# Altium PCB Controller PCB.PcbDoc (part 1 of 2)
Units mm, origin at the board's own origin, x right, y up, seen from the top; angles counter-clockwise.
Board outline 152.4 x 101.6 mm, 4 copper layers (Top Layer, Power, Ground, Bottom Layer), stack 0.903 mm thick; 79 components, 88 nets, 350 pads, 72 vias.
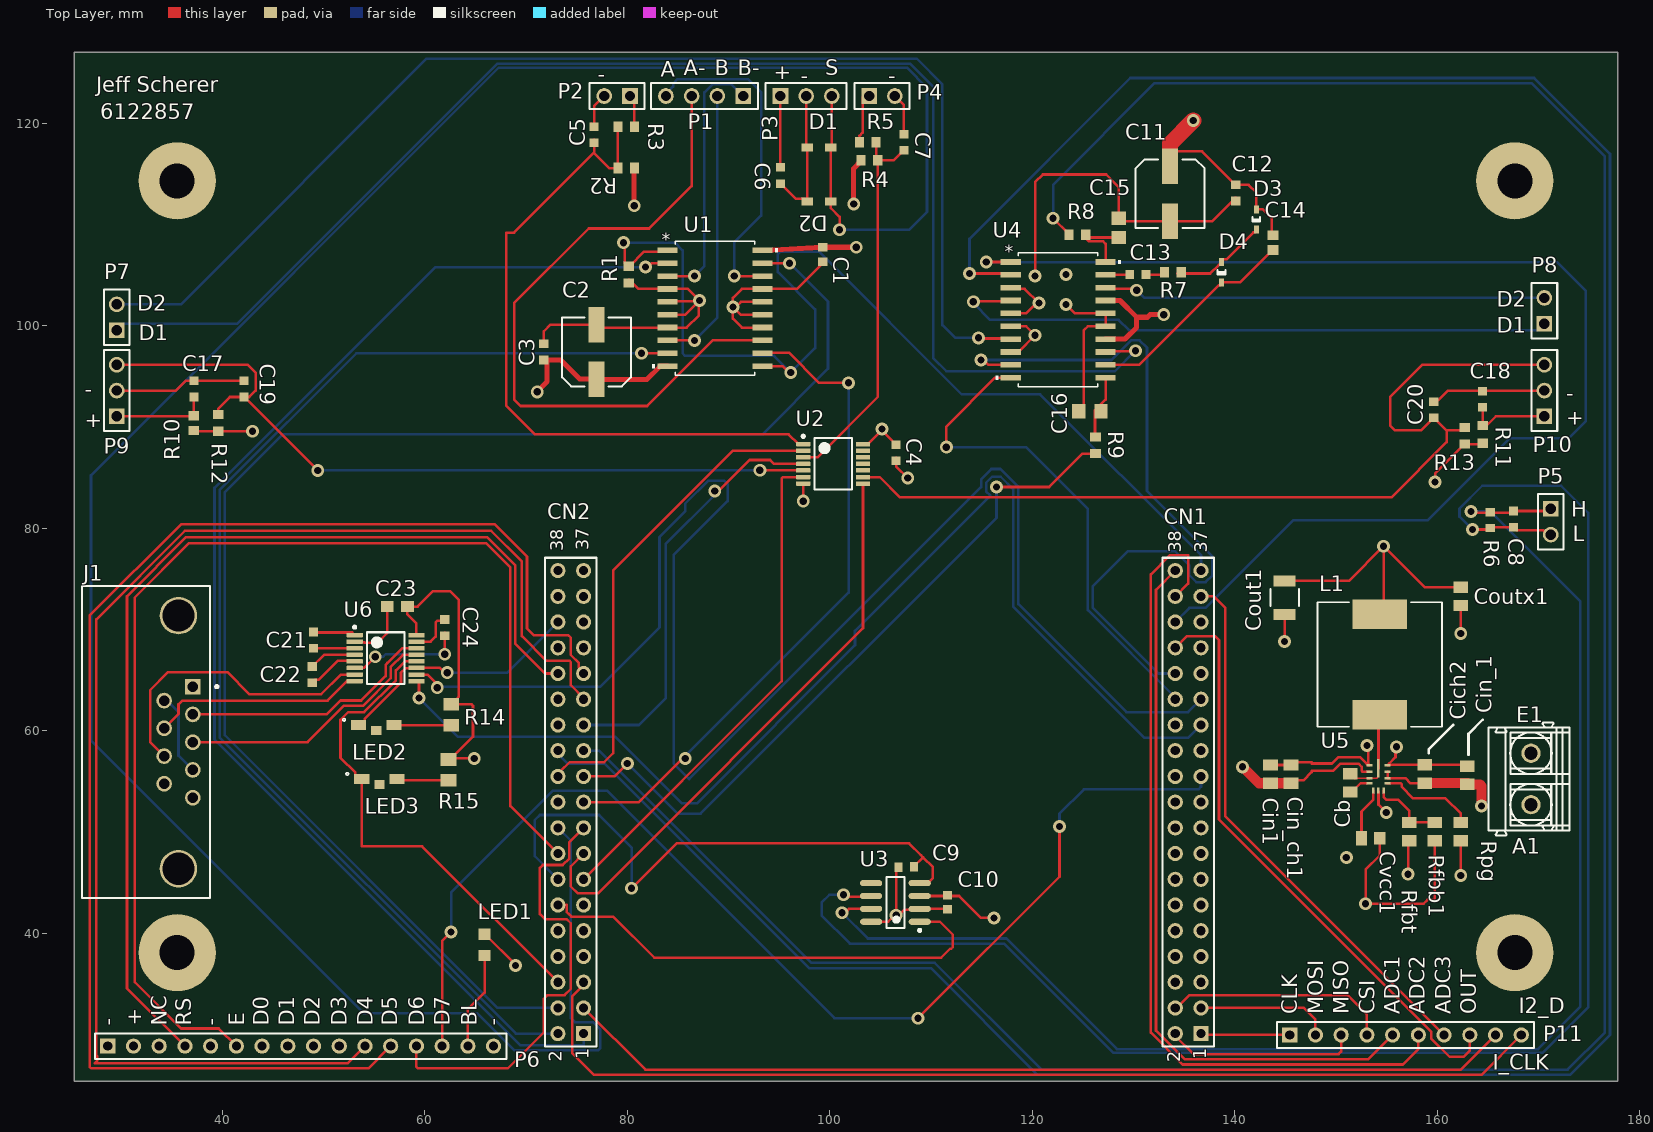
[diagram p0: Top Layer view]
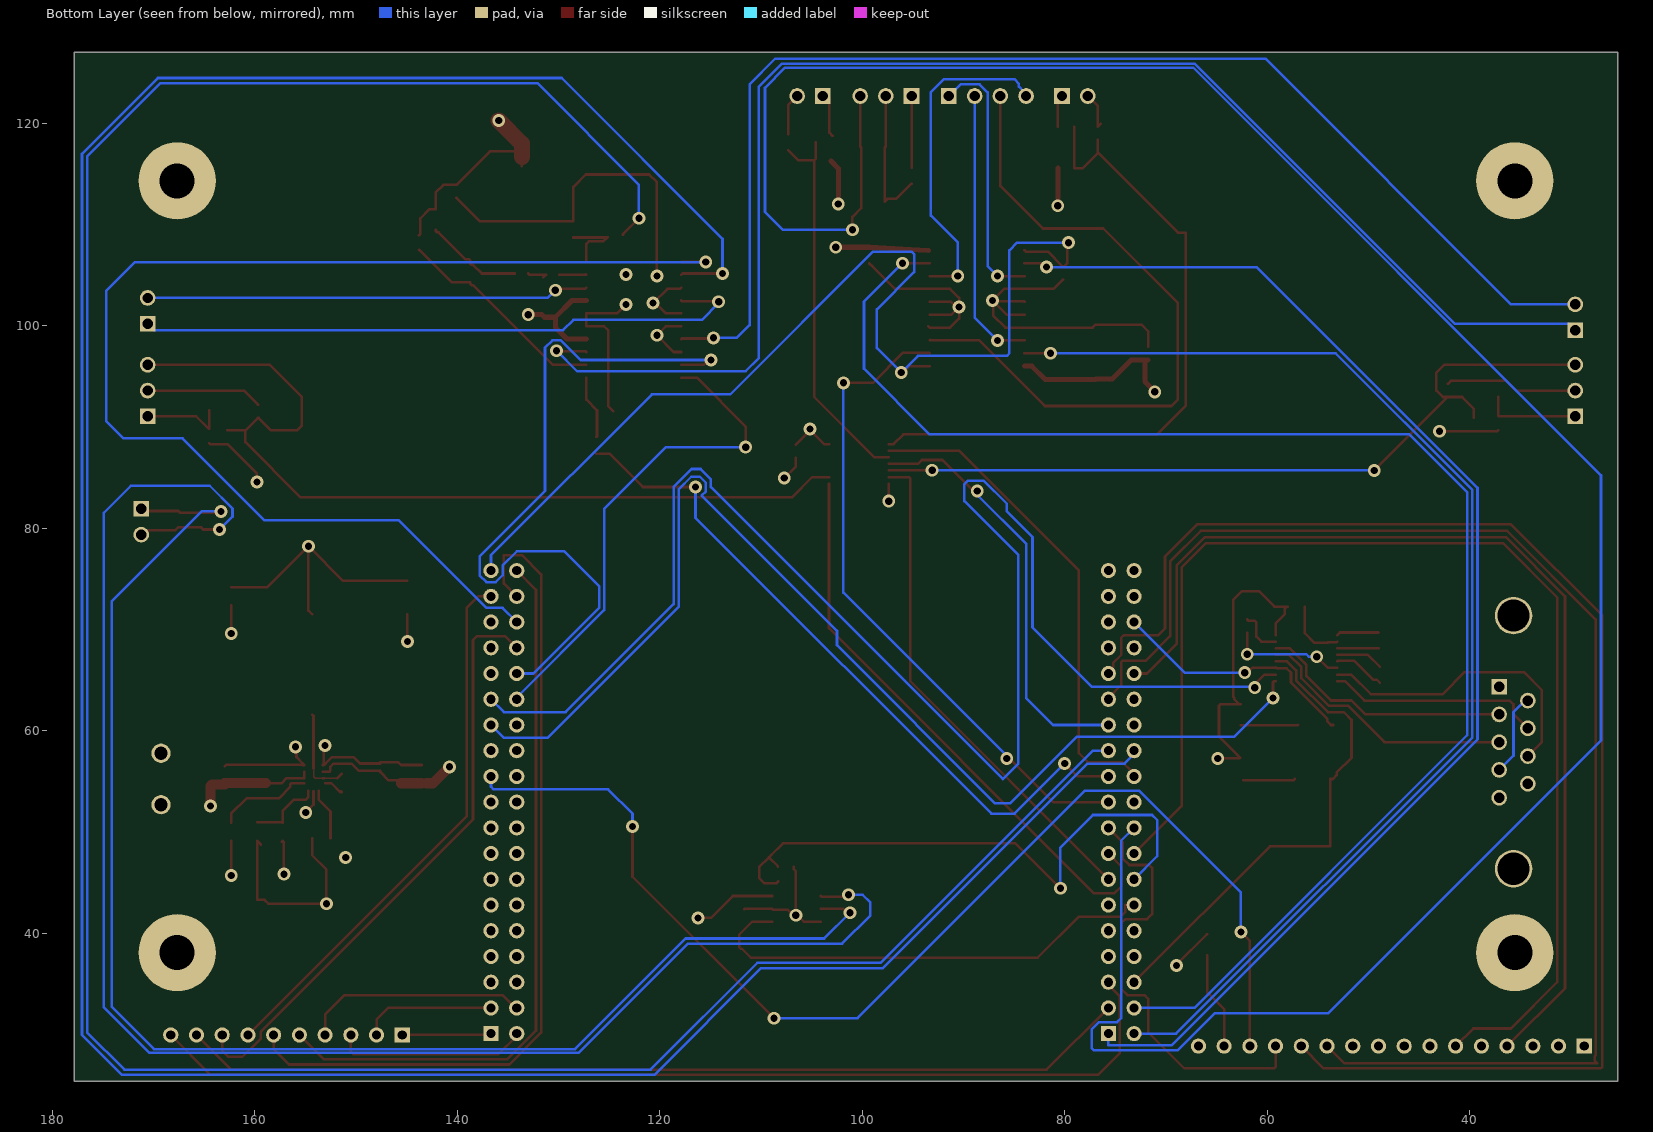
[diagram p1: Bottom Layer view, seen from below]
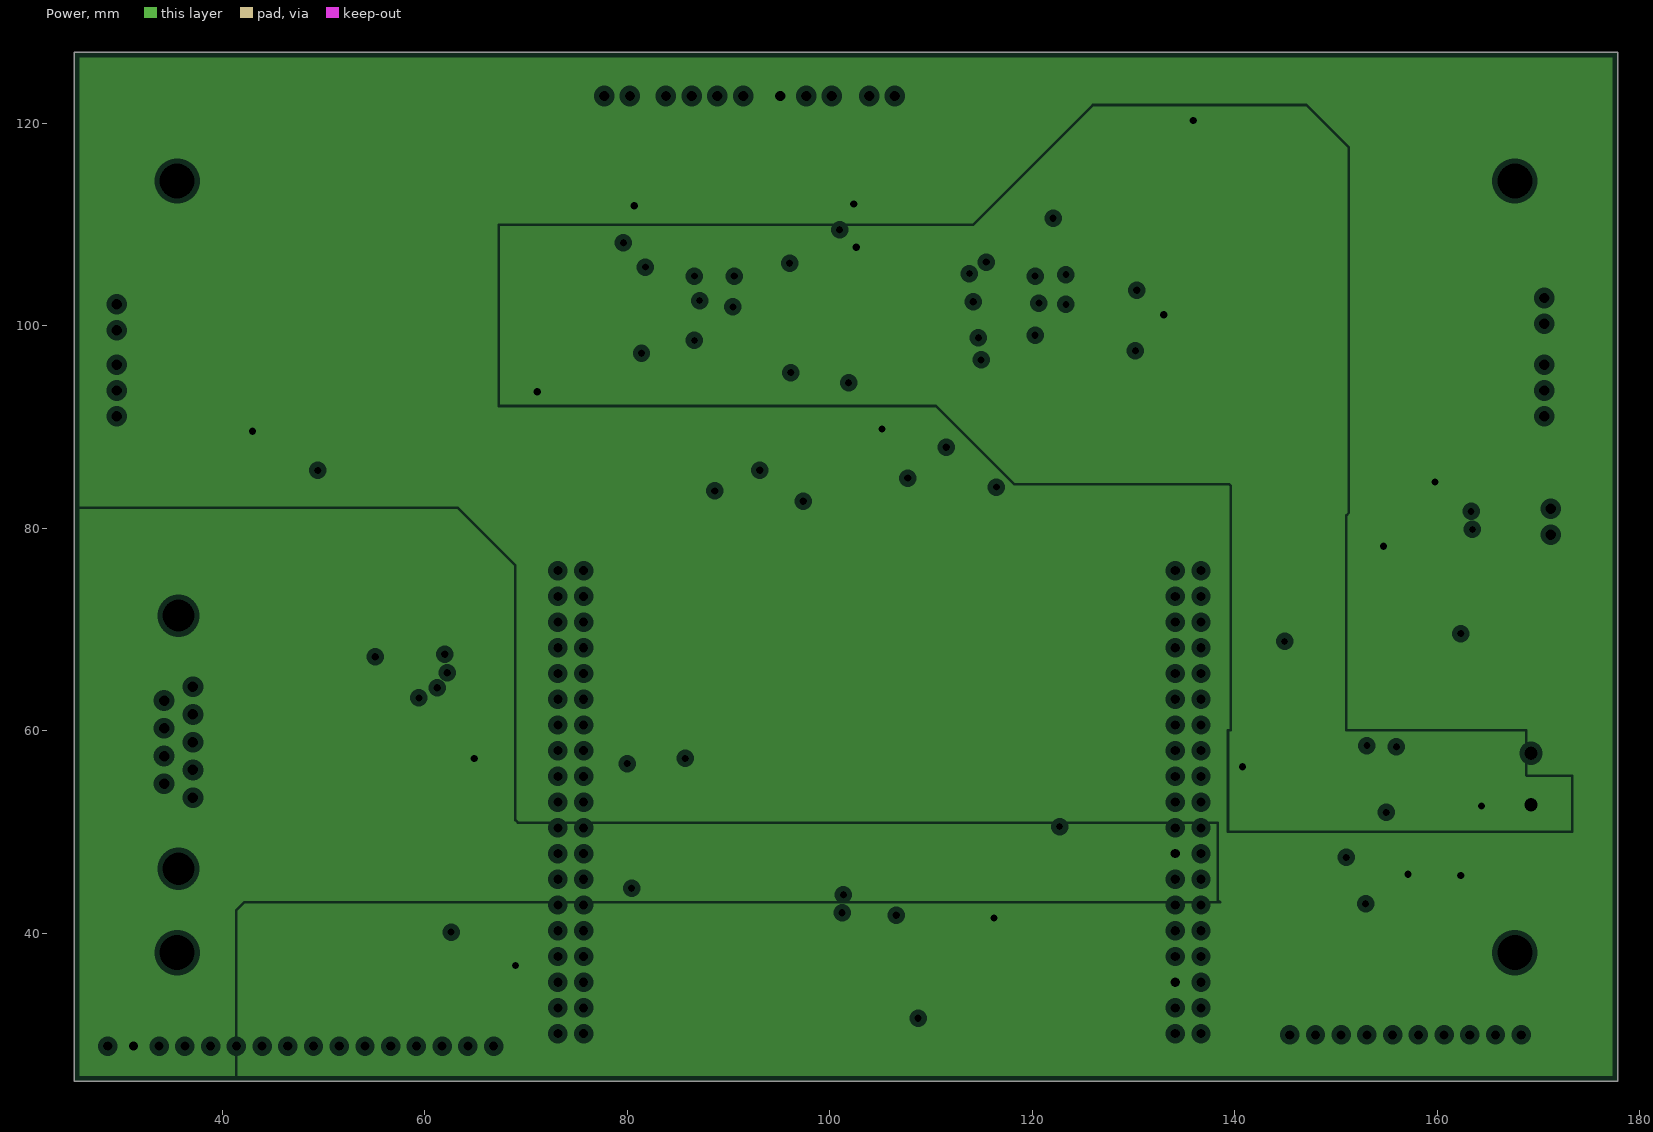
[diagram p2: Power, clearances drawn from the general rule]
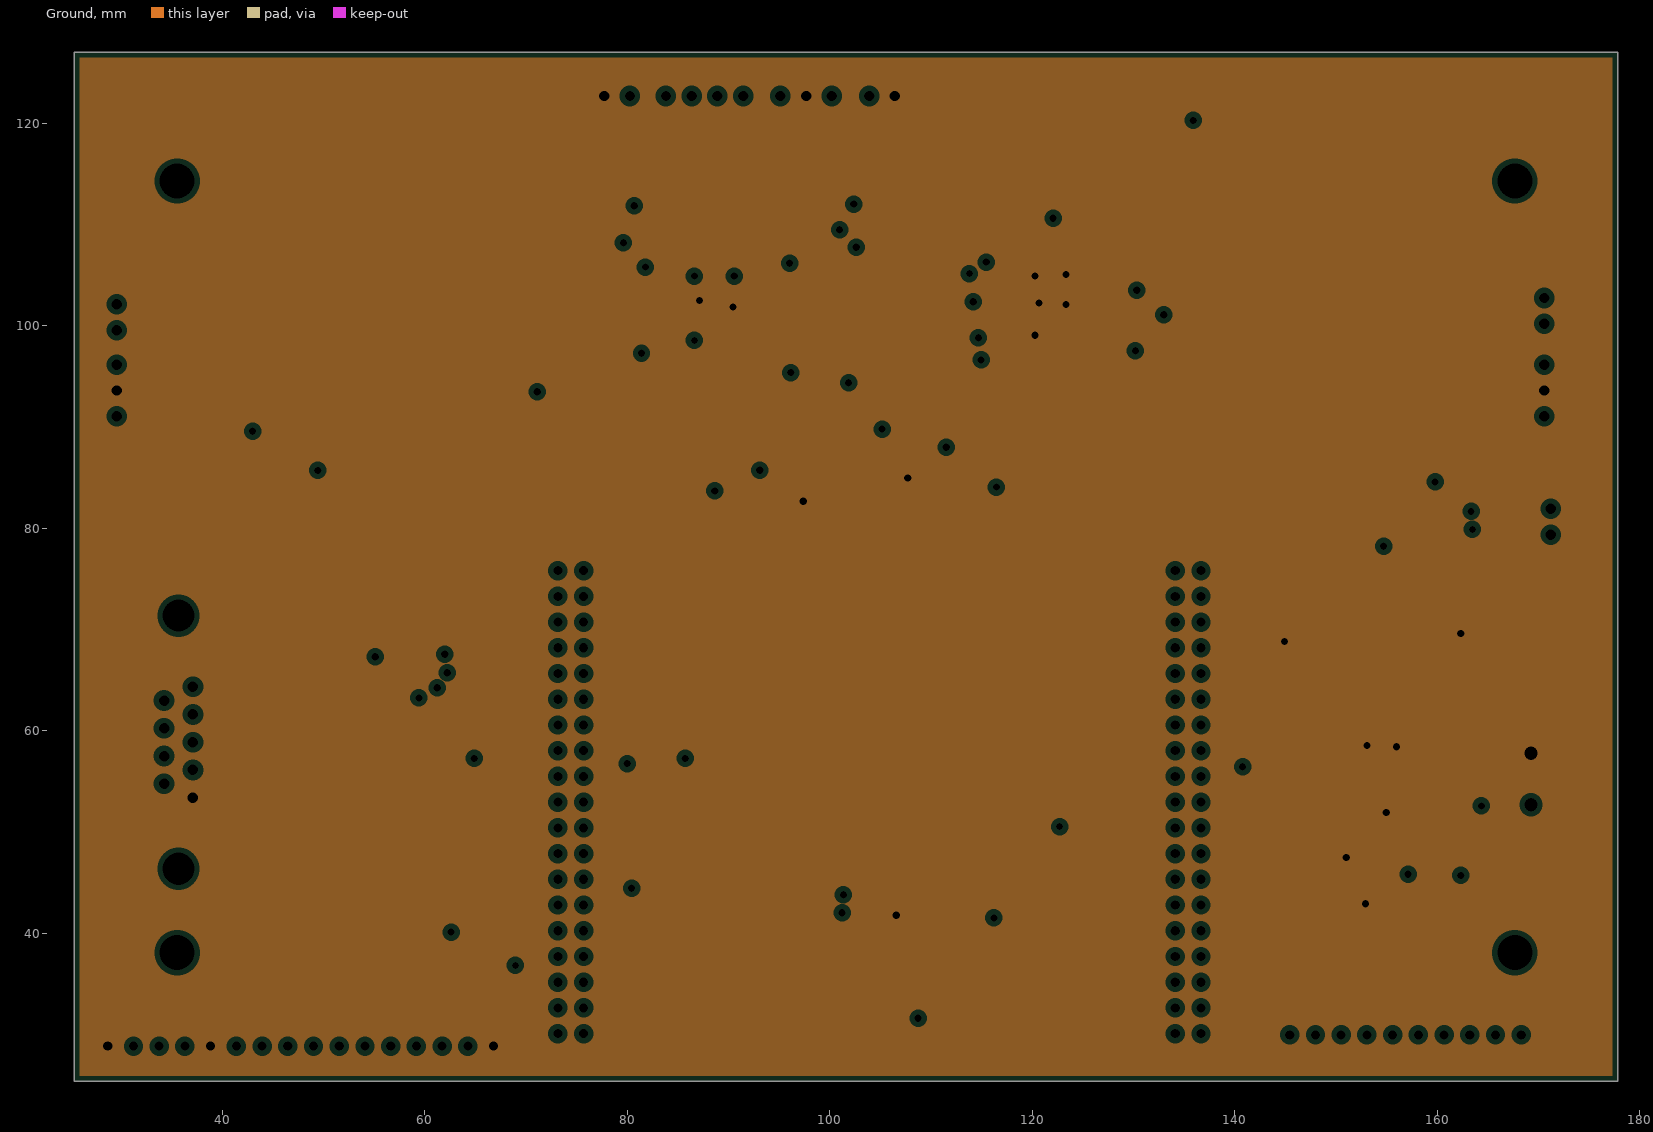
[diagram p3: Ground, clearances drawn from the general rule]

## Layer stack, top to bottom
Top Solder: solder mask 0.0102, Solder Resist, Dk 3.5
Top Layer: signal copper 0.0356
Dielectric 2: prepreg 0.254, PP-006, Dk 4.1
Power: plane copper 0.035, net (Multiple Nets)
Dielectric 1: dielectric 0.254, FR-4, Dk 4.8
Ground: plane copper 0.035, net GND
Dielectric 3: prepreg 0.254, PP-006, Dk 4.1
Bottom Layer: signal copper 0.0356
Bottom Solder: solder mask 0.0102, Solder Resist, Dk 3.5

## Board outline
25.4,25.4 177.8,25.4 177.8,127 25.4,127

## Design rules (kind name [scope] priority, off if disabled: settings)
BoardOutlineClearance [All] p1: gap=0.508 ignorepadtopadclearanceinfootprint=FALSE
Clearance [All] p1: gap=0.13 ignorepadtopadclearanceinfootprint=TRUE
HoleSize [All] p1: absolutevalues=TRUE maxlimit=3.81 minlimit=0.254 maxpercent=80.000 minpercent=20.000
MinimumSolderMaskSliver [All] p1: minsoldermaskwidth=0.245
PlaneClearance [All] p1: clearance=0.508
PlaneConnect [All] p1: planeconnectstyle=Relief reliefexpansion=0.508 reliefentries=4 reliefconductorwidth=0.254 reliefairgap=0.254
PolygonConnect [All] p1: connectstyle=Relief reliefconductorwidth=0.254 reliefentries=4 polygonreliefangle="90 Angle" airgapwidth=0.254
RoutingVias [All] p1: holewidth=0.711 width=1.27 viastyle="Through Hole" minholewidth=0.711 minwidth=1.27 maxholewidth=3.81 maxwidth=8.89
SilkToSilkClearance [All] p1: silktosilkclearance=0.25
SilkToSolderMaskClearance [IsPad] p1: minsilkscreentomaskgap=0.25 clearancetoexposedcopper=TRUE
SolderMaskExpansion [All] p1: expansion=0.102
Width [All] p1: maxlimit=3 minlimit=0.135 preferedwidth=0.254 minimp=50.000000 maximp=50.000000 favimp=50.000000
24 further rules are at their usual default settings.

## Classes and differential pairs
component class "Wheel Module": C11 C12 C13 C15 C16 C17 C18 C19 C20 D3 D4 P7 P8 P9 P10 R7 R8 R9 R10 R11 R12 R13 U4
component class "Something Dope": P11
component class RS232: C21 C22 C23 C24 J1 LED2 LED3 R14 R15 U6
component class "Power Supply": Cb Cich2 Cin1 Cin_1 Cin_ch1 Cout1 Coutx1 Cvcc1 E1 L1 Rfbb1 Rfbt Rpg U5
component class MCU: CN1 CN2
component class "LCD Display": LED1 P6
component class CAN: C8 C9 C10 P5 R6 U3
component class "Camera Module": C1 C2 C3 C4 C5 C6 C7 D1 D2 P1 P2 P3 P4 R1 R2 R3 R4 R5 U2

## Components (designator, comment, footprint, x,y, rotation, side; value= is the part's Value field where it differs from the comment)
C1 "0.1uF" CAPC1608X90X35LL15T15#1 99.299,106.792 r90 top
C2 "33uF" NIC-CAPA2-6.3X7.7_V 76.962,97.409 r90 top
C3 "0.1uF" CAPC1608X90X35LL15T15#2 71.755,97.267 r270 top
C4 "0.1uF" CAPC1608X90X35LL15T15#2 106.553,87.615 r90 top
C5 "0.1uF" CAPC1608X90X35LL15T15#3 76.733,118.999 r270 top
C6 "0.1uF" CAPC1608X90X35LL15T15#3 95.123,114.681 r90 top
C7 "0.1uF" CAPC1608X90X35LL15T15#2 107.315,117.968 r270 top
C8 "0.1uF" CAPC1608X90X35LL15T15#3 167.513,80.757 r90 top
C9 "30pF" CAPC1608X87X35LL15T15 107.398,46.534 r0 top
C10 "0.1uF" CAPC1608X90X35LL15T15#4 111.633,43.039 r90 top
C11 "100uF" NIC-CAPA2-6.3X5.8_V 133.604,113.03 r270 top
C12 "0.1uF" CAPC1608X90X35LL15T15#2 140.081,113.269 r90 top
C13 "10000pF" CAPC1608X90X35LL15T15#2 130.571,105.048 r0 top
C14 "0.22uF" CAPC1608X90X35ML10T15 143.764,108.204 r90 top
C15 "1000pF" CAPC2013X140X50NL20T25#1 128.524,109.512 r270 top
C16 "1000pF" CAPC2013X140X50NL20T25#2 125.387,91.567 r0 top
C17 "0.1uF" CAPC1608X90X35LL15T15#2 37.211,93.614 r270 top
C18 "0.1uF" CAPC1608X90X35LL15T15#5 164.465,92.598 r270 top
C19 "0.1uF" CAPC1608X90X35LL15T15#2 42.164,93.614 r270 top
C20 "0.1uF" CAPC1608X90X35LL15T15#6 159.639,91.552 r270 top
C21 "0.1uF" CAPC1608X90X35LL15T15#3 49.022,68.808 r90 top
C22 "0.1uF" CAPC1608X90X35LL15T15#3 48.895,65.405 r90 top
C23 "0.1uF" CAPC1608X90X35ML15T15 57.15,72.263 r180 top
C24 "0.1uF" CAPC1608X90X35LL15T15#3 61.976,70.343 r270 top
Cb "CC0805KRX7R9BB104" 0805#1 151.384,54.864 r90 top value=100nF (schematic designator Cboot1)
Cich2 "GRM32ER71J106KA12L" 0805#1 158.75,55.74 r90 top value=10uF (schematic designator Cin_ch2)
Cin1 "GRM32ER71J106KA12L" 0805#1 143.51,55.726 r90 top value=10uF
Cin_1 "GRM32ER71J106KA12L" 0805#1 162.941,55.613 r90 top value=10uF
Cin_ch1 "GRM32ER71J106KA12L" 0805#1 145.542,55.722 r90 top value=10uF
CN1 "Header 19X2" HDR2X19 136.652,30.099 r90 top locked
CN2 "Header 19X2" HDR2X19 75.692,30.099 r90 top locked
Cout1 "C3225X5R0J686M200AC" 1210_280 144.907,73.152 r270 top value=68uF
Coutx1 "GRM21BR71A105KA01L" 0805#1 162.306,73.279 r270 top value=1uF
Cvcc1 "C0603C105Z8VACTU" 0805#2 153.403,49.403 r0 top value=1uF
D1 "ZHCS400" DIOD-SOD323-2_V 98.933,117.602 r180 top
D2 "ZHCS400" DIOD-SOD323-2_V 98.933,112.268 r180 top
D3 "1N4148WT" FAIR-SOD-523F-2_V 142.113,110.49 r90 top
D4 "1N4148WT" FAIR-SOD-523F-2_V 138.684,105.283 r90 top
E1 "1760490000" PM_5_08_90_02 169.037,55.245 r90 top locked
J1 "5747840-4" TECO-5747840-4_V 35.687,58.879 r270 top
L1 "CDRH125NP-180MC" CDRH125 154.305,66.548 r90 top value=18uH
LED1 "150080YS75000" 0805_A 65.913,38.862 r90 top
LED2 "" 1204 55.217,60.579 r0 top
LED3 "" 1204 55.527,55.245 r0 top
P1 "STEP_MOTOR_CONNECTION" SMTC-TSW-104-08-X-S 91.44,122.682 r180 top
P2 "1" SMTC-DW-02-16-X-S-200 80.264,122.682 r180 top
P3 "SERVO_CONNECTION" SMTC-TSW-103-07-X-S 95.123,122.682 r0 top
P4 "1" SMTC-DW-02-16-X-S-200 103.886,122.682 r0 top
P5 "1" SMTC-DW-02-16-X-S-200 171.196,81.915 r270 top
P6 "Header 16" HDR1X16 28.702,28.864 r0 top
P7 "DC_MOTOR1" SMTC-DW-02-16-X-S-200 29.591,99.568 r90 top
P8 "DC_MOTOR2" SMTC-DW-02-16-X-S-200 170.561,100.203 r90 top
P9 "DC_ENCODER" SMTC-TSW-103-07-X-S 29.591,91.059 r90 top
P10 "DC_ENCODER" SMTC-TSW-103-07-X-S 170.561,91.059 r90 top
P11 "Header 10" HDR1X10 145.415,29.972 r0 top
R1 "10K" RESC1609X50X30ML10T20#1 80.137,105.196 r90 top
R2 "10K" RESC1609X50X30ML10T20#1 79.756,115.57 r180 top
R3 "100R" RESC1609X50X30ML10T20#1 79.756,119.634 r180 top
R4 "10K" RESC1609X50X30ML10T20#2 103.759,116.332 r0 top
R5 "100R" RESC1609X50X30ML10T20#2 103.592,118.11 r0 top
R6 "60R" RESC1609X50X30NL10T20 165.227,80.655 r90 top
R7 "100R" RESC1609X50X30ML10T20#2 133.731,105.283 r0 top
R8 "10K" RESC1609X50X30ML10T20#2 124.293,108.966 r0 top
R9 "10K" RESC1609X50X30ML10T20#1 126.238,88.352 r90 top
R10 "332R" RESC1608X55X30ML15T15#1 37.211,90.387 r270 top
R11 "332R" RESC1608X55X30ML15T15#2 164.465,89.117 r270 top
R12 "10K" RESC1609X50X30ML10T20#2 39.624,90.257 r90 top
R13 "10K" RESC1609X50X30ML10T20#2 162.687,88.987 r90 top
R14 "1K" RESC2013X60X30ML20T20 62.611,61.586 r270 top
R15 "1K" RESC2013X60X30ML20T20 62.357,56.143 r270 top
Rfbb1 "ERJ-6ENF2492V" 0805#1 159.751,50.051 r270 top value=24.9k
Rfbt "CRCW0402100KFKED" 0805#1 157.226,50.038 r90 top value=100k (schematic designator Rfbt1)
Rpg "CRCW0402100KFKED" 0805#1 162.306,50.038 r90 top value=100k (schematic designator Rpg1)
U1 "Part Number: L293DD013TR" SO-20 88.659,101.727 r0 top locked value=Value
U2 "SN74ACT14PWR" PW0014A_N 100.33,86.36 r0 top
U3 "MCP2551-E/SN" SOIC-SN8_N 106.477,43.054 r180 top
U4 "Part Number: L6225D" SO-20 122.555,100.584 r0 top locked value=Value
U5 "LMR33630ARNXR" RNX0012B 154.178,55.499 r0 top value=N/A
U6 "MAX3232ECPWR" PW0016A_M 56.134,67.183 r0 top

## Footprints (in the part's own frame and the unit in brackets; to place one, negate y for a bottom-side part, rotate by r counter-clockwise, add the part's x,y. Pads: shape width x height; smd on the part's side, far side on the other; paste and mask are expansions set on the pad)
0805#1 [mil]
  rect 44x57 smd: 1(-35.5,0) 2(35.5,0)
  body extent -44,-29 44,29, height 57
0805#2 [mil]
  rect 44x57 smd: 1(-35.5,0)
  rect 43.31x49.21 smd: 2(35.5,0)
  body extent -44,-28 44,28, height 57
0805_A [mm] "Chip LED, 2-Leads, Body 2.0x1.3mm, IPC Medium Density"
  rect 1.1x1.2 smd: 1(-1.05,0) 2(1.05,0)
  body extent -1,-0.62 1,0.63, height 0.68
1204 [mm] "Chip LED, 2-Leads, Body 1.0x3.2mm"
  rect 1.5x1 smd: 1(-1.75,0) 2(1.75,0)
  rect 1x0.9 smd: 3(0,-0.55)
  silkscreen extent -3.3,0.38 -3.05,0.63, body extent -1.6,-0.5 1.6,0.5, height 1.49
1210_280 [mm]
  rect 1.1x2.2 smd paste+0 mask+0.051: 1(-1.65,0) 2(1.65,0)
  silkscreen extent -0.84,-1.4 0.84,1.4, body extent 0,0 0.25,0.25, height 0.25
CAPC1608X87X35LL15T15 [mm] "Chip Capacitor, 2-Leads, Body 1.60x0.80mm, IPC High Density"
  rect 0.8x0.9 smd: 1(-0.625,0) 2(0.925,0.045)
  body extent -0.87,-0.48 0.87,0.48, height 0.87
CAPC1608X90X35LL15T15#1 [mm] "Chip Capacitor, 2-Leads, Body 1.75x0.96mm, IPC High Density"
  rect 0.85x0.9 smd: 1(-0.492,0) 2(0.958,0)
  body extent -0.88,-0.48 0.87,0.48, height 0.9
CAPC1608X90X35LL15T15#2 [mm] "Chip Capacitor, 2-Leads, Body 1.75x0.96mm, IPC High Density"
  rect 0.85x0.9 smd: 1(-0.95,0) 2(0.65,0)
  body extent -0.88,-0.48 0.87,0.48, height 0.9
CAPC1608X90X35LL15T15#3 [mm] "Chip Capacitor, 2-Leads, Body 1.75x0.96mm, IPC High Density"
  rect 0.85x0.9 smd: 1(-0.65,0) 2(0.95,0)
  body extent -0.88,-0.48 0.87,0.48, height 0.9
CAPC1608X90X35LL15T15#4 [mm] "Chip Capacitor, 2-Leads, Body 1.75x0.96mm, IPC High Density"
  rect 0.85x0.9 smd: 1(-0.65,0) 2(0.711,0)
  body extent -0.88,-0.48 0.87,0.48, height 0.9
CAPC1608X90X35LL15T15#5 [mm] "Chip Capacitor, 2-Leads, Body 1.75x0.96mm, IPC High Density"
  rect 0.85x0.9 smd: 1(-0.936,0) 2(0.65,0)
  body extent -0.88,-0.48 0.87,0.48, height 0.9
CAPC1608X90X35LL15T15#6 [mm] "Chip Capacitor, 2-Leads, Body 1.75x0.96mm, IPC High Density"
  rect 0.85x0.9 smd: 1(-0.948,0) 2(0.65,0)
  body extent -0.88,-0.48 0.87,0.48, height 0.9
CAPC1608X90X35ML10T15 [mm] "Chip Capacitor, 2-Leads, Body 1.60x0.80mm, IPC Low Density"
  rect 0.95x1.05 smd: 1(-0.725,0) 2(0.725,0)
  body extent -0.85,-0.45 0.85,0.45, height 0.9
CAPC1608X90X35ML15T15 [mm] "Chip Capacitor, 2-Leads, Body 1.75x0.96mm, IPC Low Density"
  rect 1.25x1.1 smd: 1(-1.15,0) 2(0.85,0)
  body extent -0.88,-0.48 0.87,0.48, height 0.9
CAPC2013X140X50NL20T25#1 [mm] "Chip Capacitor, 2-Leads, Body 2.00x1.25mm, IPC Medium Density"
  rect 1.3x1.45 smd: 1(-1.1,0) 2(0.8,0)
  body extent -1.1,-0.72 1.1,0.72, height 1.4
CAPC2013X140X50NL20T25#2 [mm] "Chip Capacitor, 2-Leads, Body 2.00x1.25mm, IPC Medium Density"
  rect 1.3x1.45 smd: 1(-0.8,0) 2(1.4,0)
  body extent -1.1,-0.72 1.1,0.72, height 1.4
CDRH125 [mil]
  rect 114x213 smd: 1(-195,0) 2(195,0)
  silkscreen extent -242,-242 242,242, body extent -254,-242 254,242, height 248
DIOD-SOD323-2_V [mil] "SMT Diode, 2 Leads, Body 1.7 x 1.3 mm"
  rect 45x30 smd: 1(-46.26,0) 2(46.26,0)
  body extent -39,-27 38,28, height 43
FAIR-SOD-523F-2_V [mm] "SMD, 2-Leads, Body 1.2x0.8mm, Height 0.7mm"
  rect 0.8x0.5 smd: 1(-1,0) 2(1,0)
  silkscreen extent -0.2,-0.38 0.24,0.38, body extent -0.6,-0.4 0.6,0.4, height 0.71
HDR1X10 [mm] "Connector; Header; 10 Position"
  rect 1.5x1.5 hole 0.9: 1(0,0)
  round 1.5 hole 0.9: 2(2.54,0) 3(5.08,0) 4(7.62,0) 5(10.16,0) 6(12.7,0) 7(15.24,0) 8(17.78,0) 9(20.32,0) 10(22.86,0)
  silkscreen extent -1.27,-1.27 24.13,1.27
HDR1X16 [mm] "Connector; Header; 16 Position"
  rect 1.5x1.5 hole 0.9: 1(0,0)
  round 1.5 hole 0.9: 2(2.54,0) 3(5.08,0) 4(7.62,0) 5(10.16,0) 6(12.7,0) 7(15.24,0) 8(17.78,0) 9(20.32,0) 10(22.86,0) 11(25.4,0) 12(27.94,0) 13(30.48,0) 14(33.02,0) 15(35.56,0) 16(38.1,0)
  silkscreen extent -1.27,-1.27 39.37,1.27
HDR2X19 [mm] "Connector; Header; 19x2 Position"
  rect 1.5x1.5 hole 0.9: 1(0,0)
  round 1.5 hole 0.9: 2(0,2.54) 3(2.54,0) 4(2.54,2.54) 5(5.08,0) 6(5.08,2.54) 7(7.62,0) 8(7.62,2.54) 9(10.16,0) 10(10.16,2.54) 11(12.7,0) 12(12.7,2.54) 13(15.24,0) 14(15.24,2.54) 15(17.78,0) 16(17.78,2.54) 17(20.32,0) 18(20.32,2.54) 19(22.86,0) 20(22.86,2.54) 21(25.4,0) 22(25.4,2.54) 23(27.94,0) 24(27.94,2.54) 25(30.48,0) 26(30.48,2.54) 27(33.02,0) 28(33.02,2.54) 29(35.56,0) 30(35.56,2.54) 31(38.1,0) 32(38.1,2.54) 33(40.64,0) 34(40.64,2.54) 35(43.18,0) 36(43.18,2.54) 37(45.72,0) 38(45.72,2.54)
  silkscreen extent -1.27,-1.27 46.99,3.81
NIC-CAPA2-6.3X5.8_V [mm] "Aluminum Electrolytic Capacitor, Diameter 6.3mm, Height 6.1mm, Pitch 5.4mm"
  rect 3.5x1.6 smd: 1(-2.7,0) 2(2.7,0)
  silkscreen extent -3.4,-3.4 3.4,3.4, body extent -3.14,-3.12 3.14,3.15, height 6.1
NIC-CAPA2-6.3X7.7_V [mm] "Aluminum Electrolytic Capacitor, Diameter 6.3mm, Height 8mm, Pitch 5.4mm"
  rect 3.5x1.6 smd: 1(-2.7,0) 2(2.7,0)
  silkscreen extent -3.4,-3.4 3.4,3.4, body extent -3.14,-3.12 3.14,3.15, height 8
PM_5_08_90_02 [mm] "PM 5.08/02/90 3.5"
  round 1.9 hole 1.3: A1(-2.54,-0.2) A2(2.54,-0.2)
  silkscreen extent -5.58,-4 5.58,4, body extent -5.58,-4 5.58,4, height 10.01
PW0014A_N [mm] "SOP, 14-Leads, Body 5.1x4.5mm, Pitch 0.65mm, IPC Medium Density"
  rrect22% 1.4x0.45 smd: 1(-2.95,1.95) 2(-2.95,1.3) 3(-2.95,0.65) 4(-2.95,0) 5(-2.95,-0.65) 6(-2.95,-1.3) 7(-2.95,-1.95) 8(2.95,-1.95) 9(2.95,-1.3) 10(2.95,-0.65) 11(2.95,0) 12(2.95,0.65) 13(2.95,1.3) 14(2.95,1.95)
  silkscreen extent -3.07,-2.55 1.85,2.85, body extent -3.21,-2.5 3.21,2.5, height 1
PW0016A_M [mm] "SOP, 16-Leads, Body 5.1x4.5mm, Pitch 0.65mm, IPC Low Density"
  rrect22% 1.6x0.45 smd: 1(-3.05,2.275) 2(-3.05,1.625) 3(-3.05,0.975) 4(-3.05,0.325) 5(-3.05,-0.325) 6(-3.05,-0.975) 7(-3.05,-1.625) 8(-3.05,-2.275) 9(3.05,-2.275) 10(3.05,-1.625) 11(3.05,-0.975) 12(3.05,-0.325) 13(3.05,0.325) 14(3.05,0.975) 15(3.05,1.625) 16(3.05,2.275)
  silkscreen extent -3.17,-2.55 1.85,3.17, body extent -3.21,-2.5 3.21,2.5, height 1
RESC1608X55X30ML15T15#1 [mm] "Chip Resistor, 2-Leads, Body 1.60x0.80mm, IPC Low Density"
  rect 0.9x1.05 smd: 1(-0.725,0) 2(0.725,0)
  body extent -0.87,-0.48 0.87,0.48, height 0.55
RESC1608X55X30ML15T15#2 [mm] "Chip Resistor, 2-Leads, Body 1.60x0.80mm, IPC Low Density"
  rect 0.9x1.05 smd: 1(-1.025,0) 2(0.725,0)
  body extent -0.87,-0.48 0.87,0.48, height 0.55
RESC1609X50X30ML10T20#1 [mm] "Chip Resistor, 2-Leads, Body 1.55x0.85mm, IPC Low Density"
  rect 0.9x1.05 smd: 1(-0.975,0) 2(0.675,0)
  body extent -0.82,-0.48 0.82,0.48, height 0.5
RESC1609X50X30ML10T20#2 [mm] "Chip Resistor, 2-Leads, Body 1.55x0.85mm, IPC Low Density"
  rect 0.9x1.05 smd: 1(-0.675,0) 2(0.975,0)
  body extent -0.82,-0.48 0.82,0.48, height 0.5
RESC1609X50X30NL10T20 [mm] "Chip Resistor, 2-Leads, Body 1.55x0.85mm, IPC Medium Density"
  rect 0.8x0.95 smd: 1(-0.625,0) 2(0.925,0)
  body extent -0.82,-0.48 0.82,0.48, height 0.5
RESC2013X60X30ML20T20 [mm] "Chip Resistor, 2-Leads, Body 2.00x1.25mm, IPC Low Density"
  rect 1.25x1.55 smd: 1(-1.025,0) 2(1.025,0)
  body extent -1.1,-0.72 1.1,0.72, height 0.6
RNX0012B [mm]
  rect 0.6x0.25 smd paste+0 mask+0: 1(-0.9,1.125) 2(-0.9,0.475) 3(-0.9,-0.175) 4(-0.9,-0.675) 8(0.9,-0.675) 9(0.9,-0.175) 10(0.9,0.475) 11(0.9,1.125)
  rect 0.25x0.6 smd paste+0 mask+0: 5(-0.5,-1.4) 6(0,-1.4) 7(0.5,-1.4)
  rect 0.25x1.825 smd paste-0.9 mask+0: 12(0,0.788)
  body extent 0,0 0.25,0.25, height 0.25
SMTC-DW-02-16-X-S-200 [mm] "Low Cost Board Spacer, 1x2 Pins, Vertical, 2.54mm Pitch, Male"
  rect 1.55x1.55 hole 1.02: 1(0,0)
  round 1.55 hole 1.02: 2(2.54,0)
  silkscreen extent -1.46,-1.27 4,1.27, body extent -1.4,-1.27 3.81,1.27, height 8.51
SMTC-TSW-103-07-X-S [mm] ".025 SQ Post Terminal Strip Assembly, 1x3 Pins, Vertical, 2.54mm Pitch, Male"
  rect 1.55x1.55 hole 1.02: 1(0,0)
  round 1.55 hole 1.02: 2(2.54,0) 3(5.08,0)
  silkscreen extent -1.46,-1.27 6.54,1.27, body extent -1.27,-1.27 6.35,1.27, height 8.38
SMTC-TSW-104-08-X-S [mm] ".025 SQ Post Terminal Strip Assembly, 1x4 Pins, Vertical, 2.54mm Pitch, Male"
  rect 1.55x1.55 hole 1.02: 1(0,0)
  round 1.55 hole 1.02: 2(2.54,0) 3(5.08,0) 4(7.62,0)
  silkscreen extent -1.46,-1.27 9.08,1.27, body extent -1.27,-1.27 8.89,1.27, height 8.38
SO-20 [mil]
  rect 78x22 smd paste+0 mask+0: 1(-184.5,225) 2(-184.5,175) 3(-184.5,125) 4(-184.5,75) 5(-184.5,25) 6(-184.5,-25) 7(-184.5,-75) 8(-184.5,-125) 9(-184.5,-175) 10(-184.5,-225) 11(184.5,-225) 12(184.5,-175) 13(184.5,-125) 14(184.5,-75) 15(184.5,-25) 16(184.5,25) 17(184.5,75) 18(184.5,125) 19(184.5,175) 20(184.5,225)
  silkscreen extent -244,-261 244,261, body extent 0,0 10,10, height 10
SOIC-SN8_N [mm] "SOIC, 8-Leads, Body 4.9x3.9mm, Pitch 1.27mm, IPC Medium Density"
  oval 2.2x0.6 smd: 1(-2.4,1.905) 2(-2.4,0.635) 3(-2.4,-0.635) 4(-2.4,-1.905) 5(2.4,-1.905) 6(2.4,-0.635) 7(2.4,0.635) 8(2.4,1.905)
  silkscreen extent -2.53,-2.5 0.9,2.88, body extent -2,-2.5 2,2.5, height 1.75
TECO-5747840-4_V [mm] "THD, 9-Leads, Body 30.81x18.62mm, Pitch 1.37mm"
  rect 1.55x1.55 hole 1.04: 1(-5.48,1.42)
  round 1.55 hole 1.04: 2(-2.74,1.42) 3(0,1.42) 4(2.74,1.42) 5(5.48,1.42) 6(-4.11,-1.42) 7(-1.37,-1.42) 8(1.37,-1.42) 9(4.11,-1.42)
  round 3.7 hole 3.17: MH1(-12.495,0) MH2(12.495,0)
  silkscreen extent -15.41,-9.52 15.41,3.91, body extent -15.52,-15.42 15.52,3.19, height 12.27

## Part data
C1 C3 C4 C5 C6 C7 C8 C10 C12 C17 C18 C19 C20 C21 C22 C23 C24: library part CMP-2006-04389-2, "Chip Capacitor, 100 nF, +/- 10%, 50 V, -55 to 125 degC, 0603 (1608 Metric), RoHS, Tape and Reel", Capacitance="100 nF", Case\Package=0603, Case Code (Metric)=1608, Max Operating Temperature="125 degC", Min Operating Temperature="-55 degC", Package Quantity=4000, Tolerance=10%, Type (Capacitors)=X7R, Voltage Rating="50 V", Case Code (Imperial)=0603, ComponentLink1Description="Manufacturer URL", ComponentLink1URL=http://www.avx.com/, ComponentLink2Description=Datasheet, ComponentLink2URL=http://datasheets.avx.com/X7RDielectric.pdf, DatasheetVersion=07/2016, Height="0.9 mm", Length="1.6 mm", Mount="Surface Mount", Mounting Technology="Surface Mount", PackageDescription="2-Pin Surface Mount Device, Body 1.6 x 0.81 mm", PackageReference=0603, Packaging="Tape and Reel", Pins=2, Radiation Hardening=No, REACH SVHC="No SVHC", RoHSCompliant=true, Voltage Rating (DC)="50 V", Width="0.81 mm"
C2: library part CMP-0687-00057-1, "Aluminum Electrolytic Capacitor, UD Series, Low Impedance, 33 uF, 50 V, + / - 20%, -55 to 105 degC, Chip Type, 6.3 x 7.7 mm D x L, Pb-Free, Reel", Manufacturer=Nichicon, PartNumber=UUD1H330MCL1GS, Rated Capacitance="33 uF", Rated Ripple Current (at 100kHz)="185 mA", Rated Voltage="50 V", Tolerance Rated Capacitance="-20 to 20%", ComponentLink1Description="Manufacturer URL", ComponentLink1URL=http://www.nichicon.co.jp/, ComponentLink2Description=Datasheet, ComponentLink2URL=http://products.nichicon.co.jp/en/pdf/XJA043/e-ud.pdf, ComponentLink3Description="Package Specification", ComponentLink3URL=http://products.nichicon.co.jp/en/pdf/XJA043/e-ud.pdf, DatasheetVersion=08/2012, Diameter="6.3 mm", Endurance Time="2000 h", Impedance="0.68 Ohm", Length="7.7 mm", Mounting Technology="Surface Mount", PackageDescription="2-Pin Surface Mount Device, Diameter 6.3 mm, Height 7.7 mm, Pitch 5.4 mm", PackageReference=CAPAE-D6.3H7.7, Packing="Dia382mm Reel", RoHS=TRUE
C9: library part CMP-2006-03166-1, Manufacturer=Kemet, Part Number=C0603C300J5GACTU
C11: library part CMP-0687-00050-1, "Aluminum Electrolytic Capacitor, UD Series, Low Impedance, 100 uF, 16 V, + / - 20%, -55 to 105 degC, Chip Type, 6.3 x 5.8 mm D x L, Pb-Free, Reel", Manufacturer=Nichicon, PartNumber=UUD1C101MCL1GS, Rated Capacitance="100 uF", Rated Ripple Current (at 100kHz)="230 mA", Rated Voltage="16 V", Tolerance Rated Capacitance="-20 to 20%", ComponentLink1Description="Manufacturer URL", ComponentLink1URL=http://www.nichicon.co.jp/, ComponentLink2Description=Datasheet, ComponentLink2URL=http://products.nichicon.co.jp/en/pdf/XJA043/e-ud.pdf, ComponentLink3Description="Package Specification", ComponentLink3URL=http://products.nichicon.co.jp/en/pdf/XJA043/e-ud.pdf, DatasheetVersion=08/2012, Diameter="6.3 mm", Endurance Time="2000 h", Impedance="0.44 Ohm", Length="5.8 mm", Mounting Technology="Surface Mount", PackageDescription="2-Pin Surface Mount Device, Diameter 6.3 mm, Height 5.8 mm, Pitch 5.4 mm", PackageReference=CAPAE-D6.3H5.8, Packing="Dia382mm Reel", RoHS=TRUE
C13: library part CMP-2006-04374-1, Manufacturer="AVX Interconnect / Elco", Part Number=06035C-103KAT2A
C14: library part CMP-2006-02784-1, Manufacturer=Murata, Part Number=GRM188F51H224ZA01D
C15 C16: library part CMP-2007-04527-1, Manufacturer="AVX Interconnect / Elco", Part Number=08051A102JAT2A
Cb: "CC0805KRX7R9BB10", Manufacturer Name=Yageo, Manufacturer Part Number=CC0805KRX7R9BB104, PackageReference=CC0805KRX7R9BB104
Cich2 Cin1 Cin_1 Cin_ch1: "GRM32ER71J106KA1", Manufacturer Name=MuRata, Manufacturer Part Number=GRM32ER71J106KA12L, PackageReference=GRM32ER71J106KA12L
CN1 CN2: "Header, 19-Pin, Dual row", Publisher="Altium Limited", Revision="17-Jul-2002: Re-released for DXP Platform."
Cout1: "C3225X5R0J686M20", Manufacturer Name=TDK, Manufacturer Part Number=C3225X5R0J686M200AC, PackageReference=C3225X5R0J686M200AC
Coutx1: "GRM21BR71A105KA0", Manufacturer Name=MuRata, Manufacturer Part Number=GRM21BR71A105KA01L, PackageReference=GRM21BR71A105KA01L
Cvcc1: Manufacturer Name=Kemet, Manufacturer Part Number=C0603C105Z8VACTU, PackageReference=C0603C105Z8VACTU
D1 D2: library part CMP-0303-00001-1, "Schottky Diode, 400mA", Forward Voltage="425 mV@If=400 mA", Manufacturer="Diodes Inc", Power Dissipation="250 mW", Reverse Current="40 uA@Vr=30 V", Reverse Voltage="40 V", Storage Temperature="-55 to 150 degC", ComponentLink1Description="Manufacturer URL", ComponentLink1URL=http://www.diodes.com/, ComponentLink2Description=Datasheet, ComponentLink2URL=http://www.diodes.com/datasheets/ZHCS400.pdf, ComponentLink3Description="Package Specification", ComponentLink3URL=http://www.diodes.com/datasheets/ap02002.pdf, DatasheetVersion="Rev. 8-2, 03/2012", Moisture Sensitivity Level=1, Mounting Technology="Surface Mount", PackageDescription="2-Pin SMT Diode, 1.7 x 1.3 mm Body", PackageReference=SOD323, PackageVersion="Rev. 73", Packing Type="Tape and Reel", PartNumber=ZHCS400
D3 D4: library part CMP-0881-00001-1, "High Conductance Fast Switching Diode, 75 V, -55 to 150 degC, 2-Pin SOD523F, RoHS", Manufacturer="Fairchild Semiconductor", Temperature Range="-55 to 150 degC", BVR (IR="5 uA)=75 V Min.", CO="4 pF Max.", ComponentLink1Description="Manufacturer URL", ComponentLink1URL=http://www.fairchildsemi.com/, ComponentLink2Description=Datasheet, ComponentLink2URL=http://www.fairchildsemi.com/ds/1N/1N4148WT.pdf, DatasheetVersion="Rev. A2", IR (VR="75 V)=5 uA Max.", Mounting Technology="Surface Mount", PackageDescription="2-Pin Surface Mount Device, Body 1.2 x 0.8 mm, Height 0.7 mm", PackageReference=SOD-523F-2, PartNumber=1N4148WT, RoHS=TRUE, VF="1 V Max."
E1: library part CMP-1559-01627-1, "OMNIMATE Signal - series PM", Colour=Orange, Manufacturer=Weidmueller, Rated_current_use_group_B_UL_1059="15 A", Rated_voltage_for_surge_voltage_class_pollution_degree_II_2="600 V", Rated_voltage_use_group_B_UL_1059="300 V", UL_94_flammability_rating=V-0, ComponentLink1Description="Manufacturer URL", ComponentLink1URL=http://www.weidmueller.com/, ComponentLink2Description="URL Link1", ComponentLink2URL=http://catalog.weidmueller.com/catalog/Start.do?localeId=en&ObjectID=1760490000, Contact_material=Cu-Leg, Contact_surface=tinned, Insulating_material="Wemid (PA)", Mounting_onto_the_PCB="Solder connection", No_of_poles=2, PackageReference=PM_5_08_90_02, Packaging=Box, PartNumber=1760490000, Pitch_inch="0,2 inch", Pitch_mm="5,08 mm", Qty="500 PCS", Revision=V1, Short_text_for_material="PM 5.08/02/90 3.5SN OR BX", Side_termination_characteristic="closed side", Solder_pin_length_mm="3,5 mm", Solid_max_H05_07_V_U="2,5 mm²", Solid_min_H05_07_V_U="0,13 mm²", Wire_cross_section_AWG_max_UL_1059="AWG 14", Wire_cross_section_AWG_min_UL_1059="AWG 26"
J1: library part CMP-2000-05648-1, "Male D-Sub Connector, Pitch 1.37 mm, 9 Position, Height 12.93 mm, Tail Length 3.55 mm, -55 to 105 degC, RoHS, Tray", Color=Black, Current Rating=6A, Manufacturer="TE Connectivity", Operating Temperature=-55°C~105°C, Package Description="9-Pin Through Hole Device, Body 30.81 x 18.62 mm, Pitch 1.37 mm", Standard Package=130, Voltage Rating=125V, 3D Model=5747840-4.pdf, Catalog Drawings=AMPD-SubMale.318, Category=Connectors,Interconnects, Connector Style=D-Sub, Connector Type=Plug,MalePins, Contact Finish=Gold, Contact Finish Thickness=Flash, Contact Type=Signal, Datasheet URL=http://www.te.com/commerce/DocumentDelivery/DDEController?Action=showdoc&DocId=Customer+Drawing%7F5747840%7FD%7Fpdf%7FEnglish%7FENG_CD_5747840_D.pdf%7F5747840-4, Datasheet Version="Rev. D, 01/2013", Dynamic Catalog=AMPLIMITEHD-20Series, Family=D-SubConnectors, Featured Product=AMPLIMITED-SubminiatureConnectors, Features=BoardLock,GroundStrap,GroundingIndents, Flange Feature=Housing/Shell(4-40), Manufacturer URL=http://www.te.com/, Mating Products="5-747905-7-ND / -CONND-SUBRCPT9POSVERTSLD / 5-787355-1-ND / -CONNRCPT9POSVERTSOLDERCUP / 5746861-4-ND / -CONNRECEPT9POSGOLDIDC / A32510-ND / -CONND-SUBRCPT9POSSLDCUPAU / AFL09B-ND / -CONND-SUBRECEPT9POS30GOLD / A31975-ND / -CONND-SUBRECEPT9P22-26AWGAU / A31974-ND / -CONND-SUBRECEPT9P20-22AWGAU / A31973-ND / -CONND-SUBRECEPT9P26-30AWGAU / A31931-ND / -CONND-SUBRCPT9POS22-26AWGAU", Mounting Technology=ThroughHole, Mounting Type=ThroughHole,RightAngle, Number of Positions=9, Number of Rows=2, Other Names=A32092, Package Reference=5747840-4, Product Training Modules=AMPLIMITED-SubConnectors, RoHS Information=5747840-4StatementofCompliance, Series=AMPLIMITEHD-20, Shell Material, Finish=Steel,TinPlated, Shell Size, Connector Layout=1(DE,E), Termination=Solder
L1: Manufacturer Name=Sumida, Manufacturer Part Number=CDRH125NP-180MC, PackageReference=CDRH125NP-180MC
LED1: library part CMP-1426-00012-1, "SMD mono-color Chip LED, WL-SMCW, Yellow", Color=Yellow, Manufacturer="Wuerth Elektronik", ComponentLink1Description="Manufacturer URL", ComponentLink1URL=http://www.we-online.com, ComponentLink2Description=Datasheet, ComponentLink2URL=http://katalog.we-online.com/led/datasheet/150080YS75000.pdf, PackageReference=0805_A, PartNumber=150080YS75000
LED2 LED3: library part CMP-1427-00002-1, "SMD Side view mono-color Chip LED-Round , WL-SMSW, Green", Color=Yellow, Manufacturer="Wuerth Elektronik", PartNumber=155124GS73200, ComponentLink1Description="Manufacturer URL", ComponentLink1URL=http://www.we-online.com, ComponentLink2Description=Datasheet, ComponentLink2URL=http://katalog.we-online.com/led/datasheet/155124GS73200.pdf, PackageReference=1204
P1: library part CMP-1024-00358-1, "0.025\" SQ Post Header, Through-hole, Vertical, -55 to 125 degC, 2.54 mm Pitch, 4-Pin, Male, RoHS", Manufacturer=Samtec, PartNumber=TSW-104-08-L-S, Temperature Range="-55 to 125 degC", ComponentLink1Description="Manufacturer URL", ComponentLink1URL=http://www.samtec.com, ComponentLink2Description=Datasheet, ComponentLink2URL=http://www.samtec.com/documents/webfiles/pdf/TSW_TH.PDF, ComponentLink3Description="Package Specification", ComponentLink3URL=http://www.samtec.com/documents/webfiles/cpdf/TSW-XXX-XX-XXX-X-XX-XXX-MKT.pdf, DatasheetVersion=F-214, Mounting Technology=Through-hole, Orientation=Vertical, PackageDescription=".025[0.64] SQ. Post Terminal Strip Assembly", PackageReference=TSW-104-08-X-S, PackageVersion="DM, 8/1988", Pitch="2.54 mm", RoHS=True
P2 P4 P5 P7 P8: library part CMP-1024-00001-1, "Flexible .025\" SQ Board Stacker, Through-hole, Vertical, -55 to 125 degC, 2.54 mm Pitch, 2-Pin, Male, RoHS", Manufacturer=Samtec, PartNumber=DW-02-16-G-S-200, Temperature Range="-55 to 125 degC", ComponentLink1Description="Manufacturer URL", ComponentLink1URL=http://www.samtec.com, ComponentLink2Description=Datasheet, ComponentLink2URL=http://www.samtec.com/documents/webfiles/pdf/DW.PDF, ComponentLink3Description="Package Specification", ComponentLink3URL=http://www.samtec.com/documents/webfiles/cpdf/XW-XX-XX-XXX-X-XXXX-XXX-XX-XXX-MKT1.PDF, DatasheetVersion=F-214, Mounting Technology=Through-hole, Orientation=Vertical, PackageDescription="Low Cost Board Spacer", PackageReference=DW-02-16-X-S-200, PackageVersion="AX, 8/1984", Pitch="2.54 mm", RoHS=True
P3 P9 P10: library part CMP-1024-00334-1, "0.025\" SQ Post Header, Through-hole, Vertical, -55 to 125 degC, 2.54 mm Pitch, 3-Pin, Male, RoHS", Manufacturer=Samtec, PartNumber=TSW-103-07-L-S, Temperature Range="-55 to 125 degC", ComponentLink1Description="Manufacturer URL", ComponentLink1URL=http://www.samtec.com, ComponentLink2Description=Datasheet, ComponentLink2URL=http://www.samtec.com/documents/webfiles/pdf/TSW_TH.PDF, ComponentLink3Description="Package Specification", ComponentLink3URL=http://www.samtec.com/documents/webfiles/cpdf/TSW-XXX-XX-XXX-X-XX-XXX-MKT.pdf, DatasheetVersion=F-214, Mounting Technology=Through-hole, Orientation=Vertical, PackageDescription=".025[0.64] SQ. Post Terminal Strip Assembly", PackageReference=TSW-103-07-X-S, PackageVersion="DM, 8/1988", Pitch="2.54 mm", RoHS=True
P6: "Header, 16-Pin", LatestRevisionDate=17-Jul-2002, LatestRevisionNote="Re-released for DXP Platform.", Publisher="Altium Limited"
P11: "Header, 10-Pin", LatestRevisionDate=17-Jul-2002, LatestRevisionNote="Re-released for DXP Platform.", Publisher="Altium Limited"
R1 R2 R4 R6 R8 R9 R12 R13: library part CMP-2000-03838-1, Manufacturer="Vishay Dale", Part Number=CRCW060310K0JNEA
R3 R5 R7: library part CMP-2000-03827-1, Manufacturer="Vishay Dale", Part Number=CRCW0603100RJNEA
R10 R11: library part CMP-2000-00439-1, Manufacturer=Panasonic, Part Number=ERJ-3EKF3320V
R14 R15: library part CMP-2001-04656-1, Manufacturer="KOA Speer", Part Number=RK73B2ATTD102J
Rfbb1: Manufacturer Name=Panasonic, Manufacturer Part Number=ERJ-6ENF2492V, PackageReference=ERJ-6ENF2492V
Rfbt Rpg: Manufacturer Name=Vishay-Dale, Manufacturer Part Number=CRCW0402100KFKED, PackageReference=CRCW0402100KFKED
U1: library part L293DD013TR, "No Description Available", Built_By=EMA_UL_Team, Copyright="Copyright (C) 2018 Accelerated Designs. All rights reserved", Manufacturer_Part_Number=L293DD013TR, RefDes=RefDes, Type=DEV, Vendor=STMicroelectronics
U2: library part CMP-0268-00001-5, "Hex Schmitt-Trigger Inverters, PW0014A, LARGE T&R", F @ Nom Voltage(Max)(Mhz)=90, Generic Part Number=SN74ACT14, ICC @ Nom Voltage(Max)(mA)=0.02, Manufacturer="Texas Instruments", Operating Temperature Range(C)="-40 to 85", Rating=Catalog, tpd @ Nom Voltage(Max)(ns)=12.5, Voltage(Nom)(V)=5, Bits(#)=6, Code_JEDEC=MO-153, DatasheetVersion=SCAS557H, Input Type=TTL, Output Drive (IOL/IOH)(Max)(mA)=-24/24, Output Type=CMOS, PackageReference=PW0014A, Schmitt Trigger=Yes, Technology Family=ACT, VCC(Max)(V)=5.5, VCC(Min)(V)=4.5
U3: library part CMP-0186-00038-2, "High-Speed CAN Transceiver, 8-Pin SOIC, Extended Temperature", Code_IPC=SOIC127P600-8, Code_JEDEC=MS-012, ComponentLink1Description="Manufacturer URL", ComponentLink1URL=http://www.microchip.com/, ComponentLink2Description=Datasheet, ComponentLink2URL=http://ww1.microchip.com/downloads/en/DeviceDoc/21667F.pdf, ComponentLink3Description="Package Specification", ComponentLink3URL=http://www.microchip.com/stellent/groups/techpub_sg/documents/packagingspec/en012702.pdf, DatasheetVersion="revF, Jul-2010", PackageDescription="8-Lead Plastic Small Outline (SN) - Narrow, 3.90mm Body [SOIC]", PackageReference=SOIC-SN8, PackageVersion="revBB, Aug-2009", RevisionNote="URLs added. DatasheetVersion updated."
U4: library part L6225D, "No Description Available", Built_By=EMA_UL_Team, Copyright="Copyright (C) 2018 Accelerated Designs. All rights reserved", Manufacturer_Part_Number=L6225D, RefDes=RefDes, Type=DEV, Vendor=STMicroelectronics
U5: Manufacturer Name="Texas Instruments", Manufacturer Part Number=LMR33630ARNXR, PackageReference=LMR33630ARNXR
U6: library part CMP-0299-01479-2, "3-V to 5.5-V Multichannel RS-232 Line Driver / Receiver with ±15-kV IEC ESD Protection, 0 to 70 degC, 16-Pin TSSOP (PW), Green (RoHS & no Sb/Br)", Drivers Per Package=2, Supply Voltage(s)(V)="3.3 or 5.0", ComponentLink1Description="Manufacturer URL", ComponentLink1URL=www.ti.com, ComponentLink2Description=Datasheet, ComponentLink2URL=http://www.ti.com/general/docs/lit/getliterature.tsp?genericPartNumber=MAX3232E&fileType=pdf, ComponentLink3Description="Package Specification", ComponentLink3URL=http://www.ti.com/litv/pdf/mpds361, DatasheetVersion=SLLS664A, ESD HBM(kV)=+/-15, ICC(Max)(mA)=1, IEC-61000-4-2 SUPPORT=TRUE, PackageDescription="16-Pin Plastic Thin Small Outline Package 5 x 4.4 mm Body ,0.65 mm Pitch", PackageReference=PW0016A, PackageVersion="revG, Feb-2011", Receivers Per Package=2, RS-232=TRUE, Single Supply=TRUE, SubFamily=RS-232

## Free pads (board coordinates)
  round 7.62 hole 3.454: 9(167.64,114.3) 10(35.56,114.3) 11(35.56,38.1) 12(167.64,38.1)

## Via types
v1: diameter 1.27, hole 0.711, Top Layer to Bottom Layer, 71 vias
v2: diameter 1.27/1.27 (per signal layer), hole 0.711, Top Layer to Bottom Layer, 1 vias

## Nets (pads, with @x,y where several pads share a name; then routed paths per layer and width w, separated by ;. In a path a pad name is that pad's centre, name@x,y a point inside that pad or via, vN(x,y) a via of type N, cw(c..) or ccw(c..) an arc to the next point about the centre after c; other vN are vias at no path point)
0: 
3V3: C23.1 CN1.16 P6.2 R14.1 R15.1 U6.16 | length 30.6
  Top Layer w0.254: C23.1@58,72.263 C23.1@58.075,72.263 ; U6.16@59.184,69.458 59.184,70.612 58.293,71.503 58.293,72.045 58.187,72.151 C23.1@58.075,72.263 ; R14.1@62.611,62.611 R14.1@62.761,62.611 ; v1(64.897,57.277) 62.728,57.277 62.672,57.333 63.005,57.666 64.77,59.431 64.77,62.462 64.621,62.611 R14.1@62.761,62.611 ; C23.1@58.075,72.263 C23.1@58.3,72.263 59.309,72.263 60.833,73.787 62.484,73.787 63.373,72.898 63.373,63.373 63.259,63.259 63.259,63.109 R14.1@62.761,62.611
5V: C4.2 C6.2 C10.2 CN1.6 Cout1.1 Coutx1.1 L1.2 LED1.2 P3.1 R2.1 R4.1 R10.2 R11.2 R12.1 R13.1 Rfbt.1 Rpg.1 U2.14 U3.3 | length 79.3
  Top Layer w0.254: R10.2@37.211,89.662 37.291,89.582 R12.1@39.624,89.582 v1(43.006,89.582) ; LED1.2@65.913,39.912 65.963,39.912 68.961,36.914 v1(68.961,36.83) ; C6.2@95.123,115.585 C6.2@95.123,115.631 P3.1@95.123,122.682 ; R4.1@103.084,116.257 R4.1@103.084,116.332 ; U2.14@103.28,88.31 103.755,88.31 105.107,89.662 105.156,89.662 C4.2@106.553,88.265 ; U3.3@108.877,43.689 112.775,43.689 114.935,41.529 v1(116.205,41.529) ; Cout1.1@144.907,74.802 151.248,74.802 v1(154.678,78.232) ; L1.2@154.305,71.501 154.678,71.874 v1(154.678,78.232) ; v1(157.099,45.847) 157.099,49.009 Rfbt.1@157.226,49.136 Rfbt.1@157.328,49.035 ; v1(159.766,84.582) 159.766,85.391 R13.1@162.687,88.312 164.385,88.312 R11.2@164.465,88.392 ; v1(162.306,45.72) Rpg.1@162.306,49.136 ; Coutx1.1@162.306,74.181 158.729,74.181 v1(154.678,78.232)
  Top Layer w0.5: v1(80.685,111.852) R2.1@80.685,115.57 ; v1(102.362,112.014) 102.362,115.535 R4.1@103.084,116.257
  other v1: 105.156,89.789
12V: C1.2 C2.1 C3.2 C11.1 C12.2 C14.2 Cich2.1 Cin1.1 Cin_1.1 Cin_ch1.1 D3.2 E1.A1 U1.10 U1.20 U4.14 U4.17 U5.2 U5.9 U5.10 | length 84.2
  Top Layer w0.254: C3.2@71.755,96.617 71.78,96.617 C3.2@72.078,96.319 ; C2.1@76.929,94.742 C2.1@76.962,94.709 ; C11.1@133.604,115.73 C11.1@133.604,116.68 ; C11.1@134.277,117.221 136.754,117.221 140.056,113.919 C12.2@140.081,113.919 141.351,113.919 142.113,113.157 D3.2@142.113,111.49 142.759,111.49 143.637,110.612 143.637,109.056 C14.2@143.764,108.929 ; Cin_ch1.1@145.539,54.824 Cin_ch1.1@145.542,54.821 145.839,55.118 146.754,55.118 147.574,55.938 147.574,56.038 149.71,56.038 150.441,56.769 152.202,56.769 152.527,56.444 152.527,56.044 152.597,55.974 U5.2@153.278,55.974 ; U5.9@155.078,55.324 156.83,55.324 157.333,54.821 158.732,54.821 158.752,54.823 Cich2.1@158.877,54.839 ; U5.9@155.078,55.33 U5.10@155.078,55.974 ; E1.A1@169.11,52.578 E1.A1@169.237,52.705
  Top Layer w0.5: v1(71.12,93.472) 71.12,93.515 72.078,94.473 C3.2@72.078,96.319 ; C3.2@71.78,96.617 73.436,96.617 75.311,94.742 C2.1@76.929,94.742 ; C2.1@76.962,94.709 81.958,94.709 83.261,96.012 U1.10@83.972,96.012 ; U1.20@93.472,107.442 C1.2@99.299,107.75 v1(102.616,107.75) ; U4.14@127.241,98.679 129.159,98.679 130.302,99.822 130.302,100.838 ; U4.17@127.241,102.489 128.651,102.489 130.302,100.838 ; v1(132.969,101.092) 131.625,101.092 131.371,100.838 130.302,100.838
  Top Layer w1: v1(140.754,56.444) 142.377,54.821 Cin1.1@143.002,54.821 ; Cin1.1@143.51,54.824 Cin_ch1.1@145.539,54.824 ; Cich2.1@158.877,54.839 Cin_1.1@162.941,54.839 ; Cin_1.1@162.941,54.712 164.189,54.712 164.338,54.563 v1(164.338,52.578)
  Top Layer w1.6: C11.1@133.604,116.68 133.604,117.983 v1(135.89,120.269)
A2_OUT: P1.3 U1.13 | length 68.8
  Top Layer w0.254: P1.3@86.36,123.19 P1.3@86.36,122.682 86.36,113.792 82.169,109.601 76.2,109.601 68.834,102.235 68.834,92.71 69.469,92.075 81.958,92.075 88.435,98.552 U1.13@93.345,98.552 U1.13@93.281,98.615
A_OUT: P1.4 U1.18 | length 32.6
  Top Layer w0.254: v1(90.564,104.902) U1.18@93.345,104.902
  Bottom Layer w0.254: P1.4@83.82,123.19 84.097,123.19 84.522,123.615 84.522,123.892 84.976,124.346 91.935,124.346 93.218,123.063 93.218,110.871 90.564,108.217 v1(90.564,104.902)
B2_OUT: P1.1 U1.3 | length 25.6
  Top Layer w0.254: U1.3@83.972,104.902 v1(86.627,104.902)
  Bottom Layer w0.254: v1(86.627,104.902) 87.621,105.896 87.621,123.038 88.421,123.838 90.284,123.838 90.932,123.19 P1.1@91.44,123.19
B_OUT: P1.2 U1.8 | length 28.3
  Top Layer w0.254: U1.8@83.972,98.552 v1(86.627,98.552)
  Bottom Layer w0.254: v1(86.627,98.552) 88.9,100.825 P1.2@88.9,122.682 P1.2@88.9,123.063 ; P1.2@88.773,123.063 P1.2@88.9,123.19
DC1_DIR1_OUT: P7.1 U4.13 | length 143.6
  Top Layer w0.254: U4.13@127.241,97.409 127.305,97.472 130.112,97.472 v1(130.175,97.536)
  Bottom Layer w0.254: P7.1@29.591,99.568 30.239,100.216 41.507,100.216 67.151,125.86 107.947,125.86 110.236,123.571 110.236,96.787 111.519,95.504 128.143,95.504 v1(130.175,97.536)
DC1_DIR2_OUT: P7.2 U4.7 | length 123.7
  Top Layer w0.254: v1(114.681,98.806) 114.745,98.742 117.805,98.742 U4.7@117.869,98.679
  Bottom Layer w0.254: P7.2@29.591,102.108 35.941,102.108 60.198,126.365 108.585,126.365 111.125,123.825 111.125,100.076 112.395,98.806 v1(114.681,98.806)
DC2_DIR1_OUT: P8.1 U4.4 | length 61.6
  Top Layer w0.254: v1(114.173,102.362) 114.236,102.425 117.805,102.425 U4.4@117.869,102.489
  Bottom Layer w0.254: v1(114.173,102.362) 114.173,102.235 115.824,100.584 128.524,100.584 129.54,99.568 169.926,99.568 P8.1@170.561,100.203
DC2_DIR2_OUT: P8.2 U4.18 | length 43.7
  Top Layer w0.254: U4.18@127.241,103.759 127.368,103.632 130.175,103.632 v1(130.302,103.505)
  Bottom Layer w0.254: v1(130.302,103.505) 131.064,102.743 P8.2@170.561,102.743